# Altium PCB Senior-Analog-batteryrecharge.PcbDoc
Units mil, origin at the board's own origin, x right, y up, seen from the top; angles counter-clockwise.
Board outline 2500 x 2200 mil, 2 copper layers (Top Layer, Bottom Layer); 27 components, 21 nets, 80 pads, 7 vias.
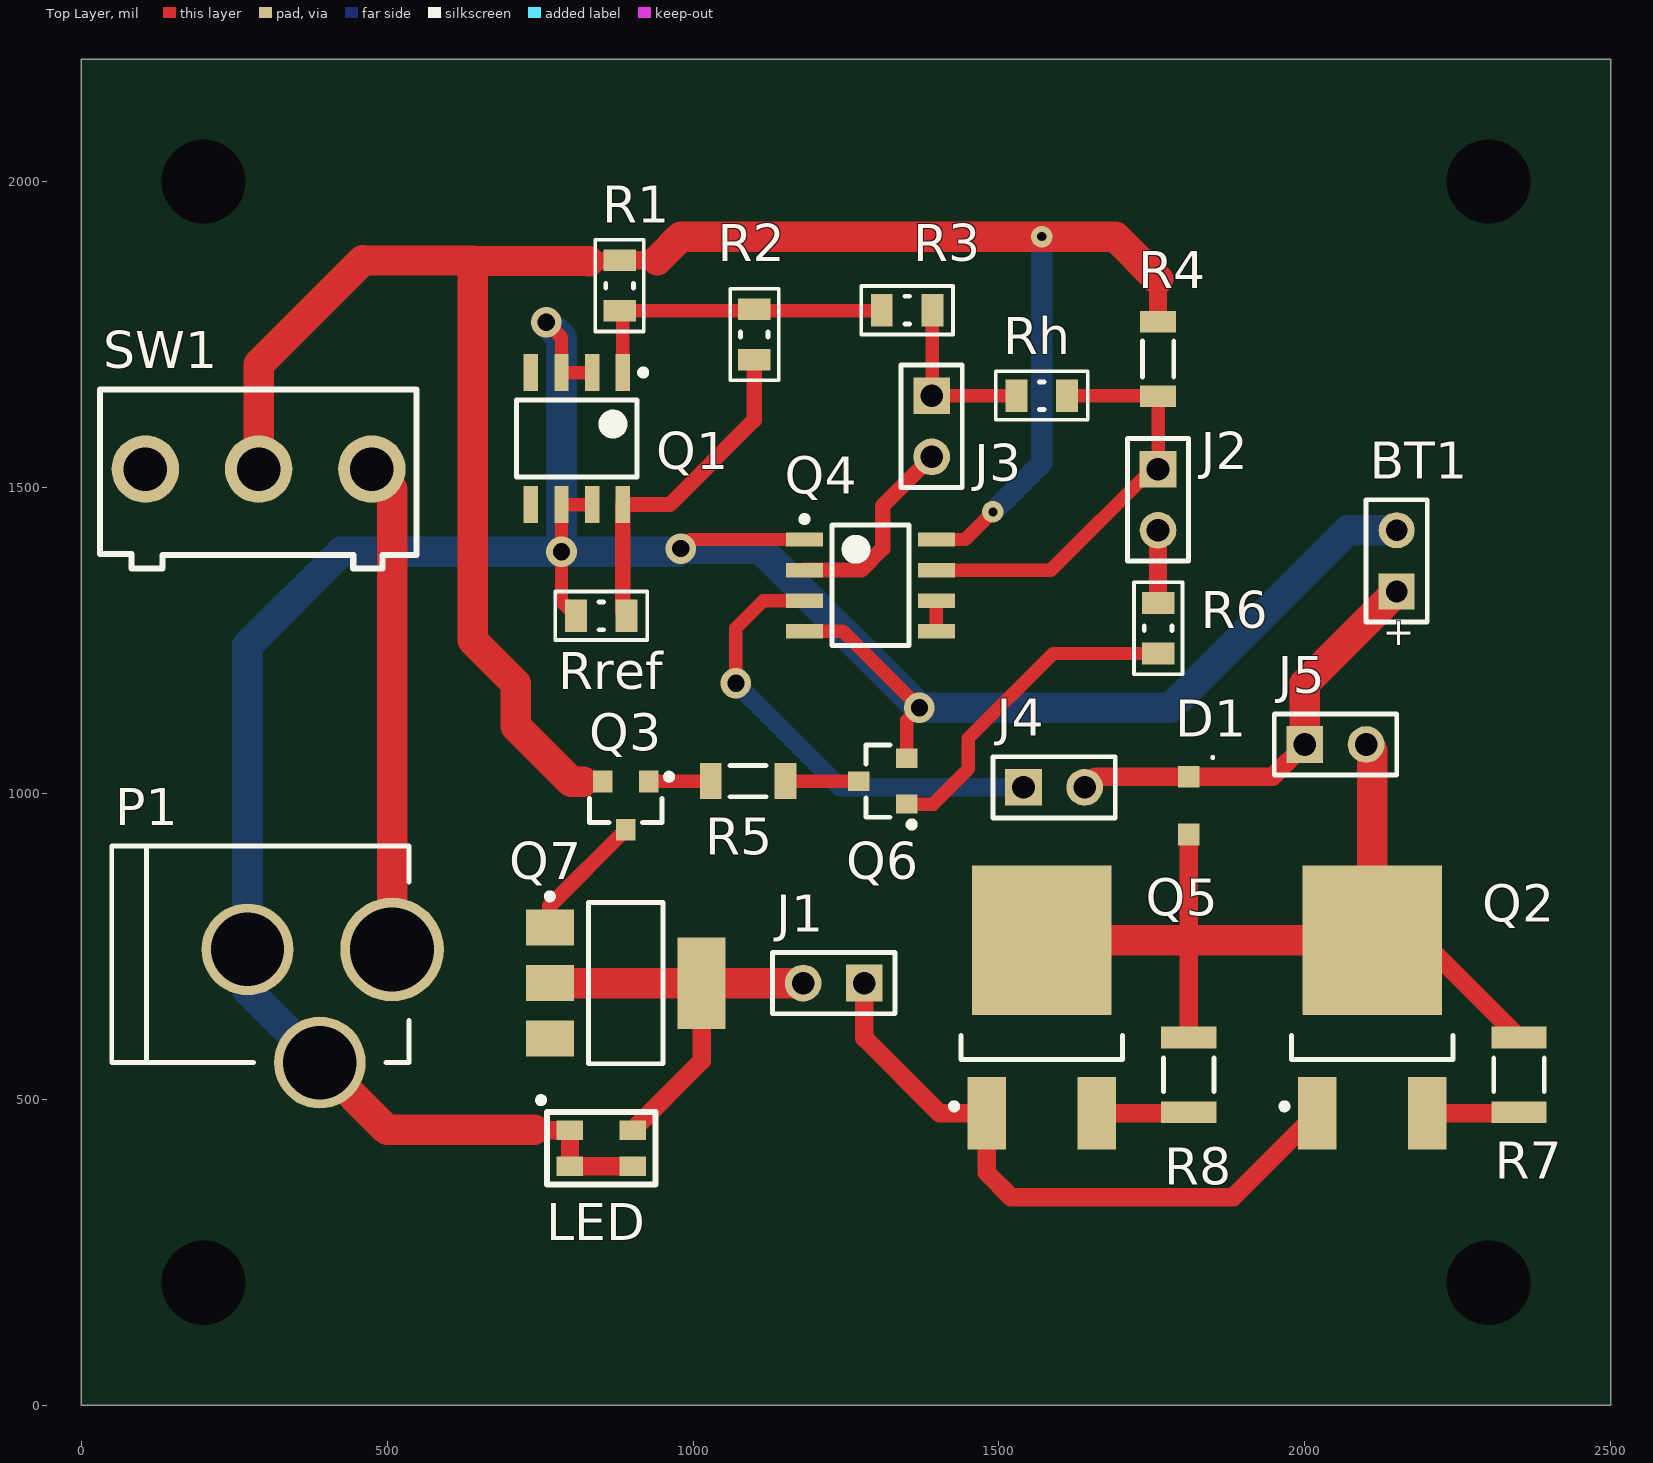
[diagram p0: Top Layer view]
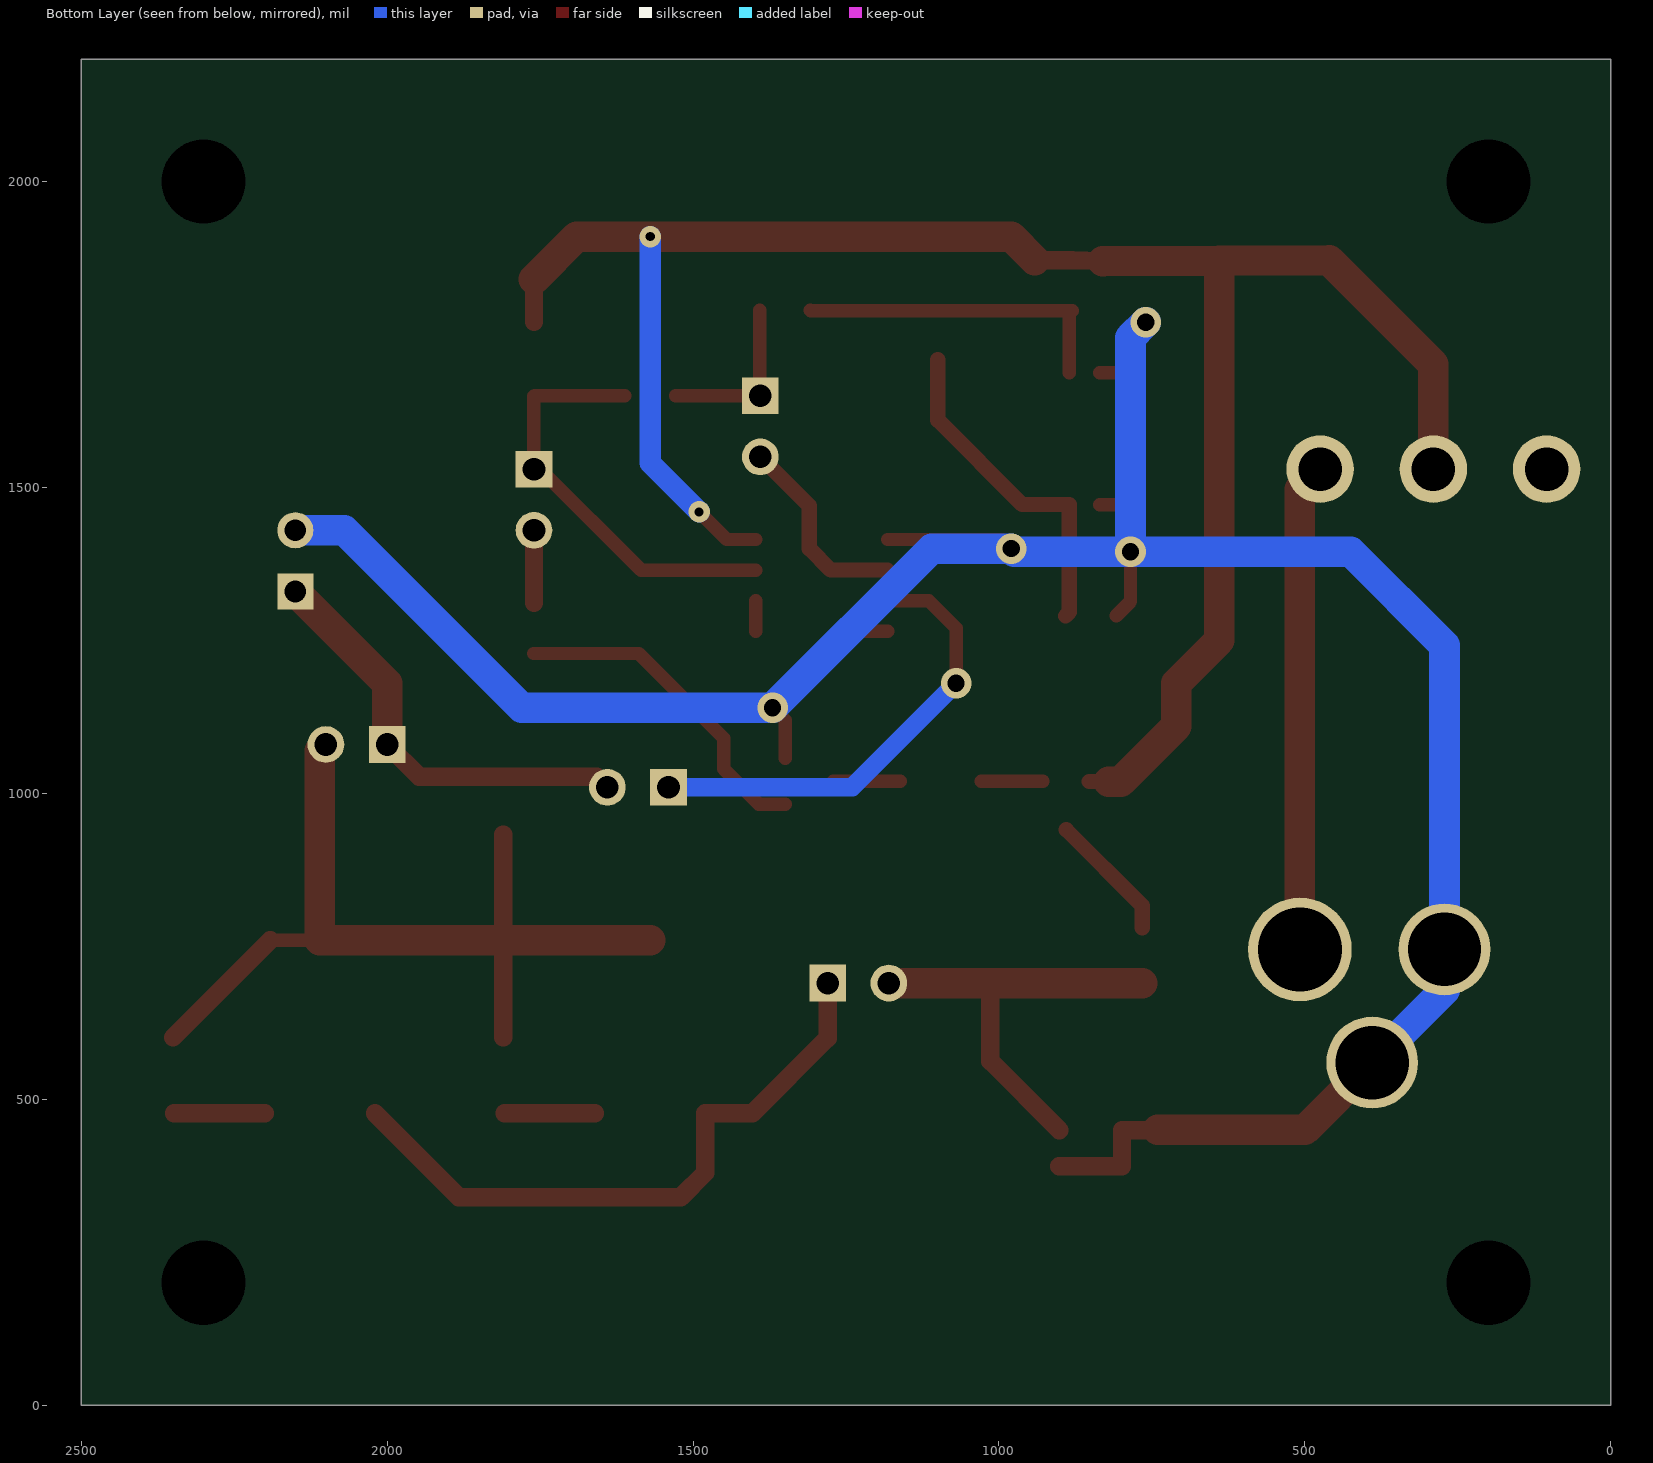
[diagram p1: Bottom Layer view, seen from below]

## Layer stack, top to bottom
Top Solder: solder mask 0.4, Solder Resist, Dk 3.5
Top Layer: signal copper 1.4
Dielectric 1: dielectric 12.6, FR-4, Dk 4.8
Bottom Layer: signal copper 1.4
Bottom Solder: solder mask 0.4, Solder Resist, Dk 3.5

## Board outline
0,0 0,2200 2500,2200 2500,0

## Design rules (kind name [scope] priority, off if disabled: settings)
Clearance [All] p1: gap=7
HoleSize [All] p1: absolutevalues=TRUE maxlimit=200 minlimit=1 maxpercent=80.000 minpercent=20.000
PolygonConnect [All] p1: connectstyle=Relief reliefconductorwidth=10 reliefentries=4 polygonreliefangle="90 Angle" airgapwidth=10
RoutingVias [All] p1: holewidth=28 width=50 viastyle="Through Hole" minholewidth=28 minwidth=50 maxholewidth=28 maxwidth=50
SilkToSilkClearance [All] p1: silktosilkclearance=7
SilkToSolderMaskClearance [IsPad] p1: minsilkscreentomaskgap=7 clearancetoexposedcopper=TRUE
SolderMaskExpansion [All] p1: expansion=4
Width [All] p1: maxlimit=100 minlimit=10 preferedwidth=10 minimp=50.000000 maximp=50.000000 favimp=50.000000
27 further rules are at their usual default settings.

## Components (designator, comment, footprint, x,y, rotation, side; value= is the part's Value field where it differs from the comment)
BT1 "Battery" BAT-2 2150,1380 r90 top
D1 "DB2J20600L" SODFL250X70-2N 1810,980 r270 top
J1 "2-pin Jumper" 2-pin-jumper 1280,690 r180 top
J2 "2-pin Jumper" 2-pin-jumper 1760,1530 r270 top
J3 "2-pin Jumper" 2-pin-jumper 1390,1650 r270 top
J4 "2-pin Jumper" 2-pin-jumper 1540,1010 r0 top
J5 "2-pin Jumper" 2-pin-jumper 2000,1080 r0 top
LED "LS E67B-S2V1-1-1-Z" OSRAM_LED 850,420 r270 top
P1 "PJ-002BH" PJ-002BH 390,560 r180 top
Q1 "TL431BCDG" SOIC127P600X175-8N 810,1580 r270 top
Q2 "NSI45090JDT4G" DPAK229P991X238-3N 2110,650 r90 top
Q3 "NSS40200LT1G" SOT95P245X110-3N 890,980 r0 top
Q4 "LM311DR2G" SOIC127P600X175-8N 1290,1340 r0 top
Q5 "NSI45090JDT4G" DPAK229P991X238-3N 1570,650 r90 top
Q6 "MMBT3904LT3G" SOT95P245X110-3N 1310,1020 r270 top
Q7 "NSI45025AZT1G" SOT230P700X180-4N 890,690 r0 top
R1 "RC0805FR-071KL" R0805 880,1830 r90 top
R2 "RC0805FR-071KL" R0805 1100,1750 r270 top
R3 "RC0805FR-071KL" R0805 1350,1790 r180 top
R4 "RC1206FR-071KL" R1206 1760,1710 r90 top
R5 "RC1206FR-071KL" R1206 1090,1020 r180 top
R6 "RC0805FR-075K6L" R0805 1760,1270 r270 top
R7 "R1210_generic" R1210 2350,540 r90 top
R8 "R1210_generic" R1210 1810,540 r90 top
Rh "RC0805FR-0718KL" R0805 1570,1650 r0 top
Rref "RC0805FR-075K1L" R0805 850,1290 r0 top
SW1 "MS12ANW03" "SPDT SWITCH" 290,1530 r270 top

## Footprints (in the part's own frame and the unit in brackets; to place one, negate y for a bottom-side part, rotate by r counter-clockwise, add the part's x,y. Pads: shape width x height; smd on the part's side, far side on the other; paste and mask are expansions set on the pad)
2-pin-jumper [mil]
  rect 60x60 hole 37: 1(0,0)
  round 60 hole 37: 2(100,0)
  silkscreen extent -50,-50 150,50
BAT-2 [mm] "Battery; 2 Leads"
  rect 1.5x1.5 hole 0.9: 1(-1.27,0)
  round 1.5 hole 0.9: 2(1.27,0)
  silkscreen extent -2.54,-1.27 2.54,1.27
DPAK229P991X238-3N [mm] "D-PAK, 3-Pads, Body 6.20x6.72mm (max), IPC Medium Density"
  rect 3x1.6 smd: 1(-4.39,2.29) 3(-4.39,-2.29)
  rect 6.2x5.8 smd: 4(2.79,0)
  silkscreen extent -4.22,-3.35 -1.15,3.76, body extent -0.51,-3.35 5.69,3.35, height 2.38
OSRAM_LED [mm]
  rect 0.8x1.1 smd: 1(-0.75,-1.3) 2(0.75,-1.3) 3(0.75,1.3) 4(-0.75,1.3)
  silkscreen extent -2.12,-2.62 1.5,2.25
PJ-002BH [mm] "2.5 mm Center Pin, 5.0 A, Right Angle, Through Hole, Dc Power Jack Connector"
  round 4.3 hole 3.5 paste+0: 1(-3,-4.7)
  round 3.81 hole 3.048 paste+0: 2(3,-4.7) 3(0,0)
  silkscreen extent -3.7,-9 8.64,0
R0805 [mm] "Chip Resistor, 2-Leads, Body 2.00x1.25mm, IPC Medium Density"
  rect 0.9x1.35 smd: 1(-1.05,0) 2(1.05,0)
  silkscreen extent -1.91,-1 1.91,1.02, body extent -1.05,-0.67 1.05,0.67, height 0.6
R1206 [mm] "Chip Resistor, 2-Leads, Body 3.05x1.55mm, IPC Medium Density"
  rect 0.9x1.5 smd: 1(-1.55,0) 2(1.55,0)
  silkscreen extent -0.75,-0.65 0.75,0.65, body extent -1.52,-0.77 1.53,0.78, height 0.55
R1210 [mm] "Chip Resistor, 2-Leads, Body 3.20x2.50mm, IPC Medium Density"
  rect 0.9x2.3 smd: 1(-1.55,0) 2(1.55,0)
  silkscreen extent -0.7,-1.05 0.7,1.05, body extent -1.6,-1.25 1.6,1.25, height 0.55
SODFL250X70-2N [mm] "SODFL, 2-Leads, Body 1.25x2.50mm, IPC Medium Density"
  rect 0.9x0.9 smd: 1(-1.2,0) 2(1.2,0)
  silkscreen extent -2.05,0.95 -1.95,1.05, body extent -0.85,-0.63 0.85,0.63, height 0.7
SOIC127P600X175-8N [mm] "SOIC, 8-Leads, Body 4.90x3.90mm, Pitch 1.27mm, IPC Medium Density"
  rect 1.52x0.6 smd: 1(-2.74,1.905) 2(-2.74,0.635) 3(-2.74,-0.635) 4(-2.74,-1.905) 5(2.74,-1.905) 6(2.74,-0.635) 7(2.74,0.635) 8(2.74,1.905)
  silkscreen extent -2.86,-2.5 1.6,2.88, body extent -2,-2.5 2,2.5, height 1.75
SOT95P245X110-3N [mm] "SOT23, 3-Leads, Body 2.90x2.45mm, Pitch 0.95mm, IPC Medium Density"
  rect 0.8x0.9 smd: 1(0.95,1) 2(-0.95,1) 3(0,-1)
  silkscreen extent -1.5,-0.7 1.93,1.32, body extent -1.5,-0.7 1.5,0.7, height 1.1
SOT230P700X180-4N [mm] "SOT223, 4-Leads, Body 6.50x7.00mm (avg), Pitch 2.30mm, IPC Medium Density"
  rect 2x1.5 smd: 1(-3.15,2.3) 2(-3.15,0) 3(-3.15,-2.3)
  rect 2x3.8 smd: 4(3.15,0)
  silkscreen extent -3.27,-3.35 1.55,3.72, body extent -1.85,-3.35 1.85,3.35, height 1.8
"SPDT SWITCH" [mm]
  round 2.8 hole 1.8: 1(0,4.7) 2(0,0) 3(0,-4.7)
  silkscreen extent -3.3,-6.58 4.13,6.55, body extent -3.11,-6.37 4,6.33, height 11.52

## Part data
BT1: "Multicell Battery"
D1: "DIODE SCHOTTKY 20V 1A SMINI2"
LED: "LED RED CLEAR 4PLCC SMD"
P1: "CONN PWR JACK 2.5X5.5MM HIGH CUR"
Q1: "IC VREF SHUNT ADJ 8SOIC"
Q2 Q5: "IC LED DRIVER/REG CCR DPAK"
Q3: "TRANS PNP 40V 2A SOT-23"
Q4: "IC COMPARATOR SGL HI VOLT 8SOIC"
Q6: "TRANS NPN 40V 0.2A SOT23"
Q7: "IC LED DRIVER LINEAR SOT-223"
R1 R2 R3: "RES SMD 1K OHM 1% 1/8W 0805"
R4 R5: "RES SMD 1K OHM 1% 1/4W 1206"
R6: "RES SMD 5.6K OHM 1% 1/8W 0805"
Rh: "RES SMD 18K OHM 1% 1/8W 0805"
Rref: "RES SMD 5.1K OHM 1% 1/8W 0805"
SW1: "SWITCH SLIDE SPDT 6A 125V"

## Free pads (board coordinates)
  round 60 hole 137.8: 0(200,200) 0(200,2000) 0(2300,200) 0(2300,2000)

## Via types
v1: diameter 50, hole 28, Top Layer to Bottom Layer, 5 vias
v2: diameter 35, hole 15, Top Layer to Bottom Layer, 2 vias

## Nets (pads, with @x,y where several pads share a name; then routed paths per layer and width w, separated by ;. In a path a pad name is that pad's centre, name@x,y a point inside that pad or via, vN(x,y) a via of type N, cw(c..) or ccw(c..) an arc to the next point about the centre after c; other vN are vias at no path point)
BAT+: J4.1 Q4.3 | length 761.2
  Top Layer w22: v1(1070,1180) 1070,1270 1115,1315 Q4.3
  Bottom Layer w30: v1(1070,1180) 1240,1010 J4.1
GND: BT1.2 LED.1 LED.2 LED.3 P1.2 P1.3 Q1.2 Q1.3 Q1.6 Q1.7 Q4.1 Q4.4 Q6.2 Rref.1 | length 4827.1
  Top Layer w22: v1(760,1770) 785,1745 Q1.3 Q1.2 ; Rref.1 785,1313.66 v1(785,1395) Q1.6 Q1.7 ; v1(980,1400) 995,1415 Q4.1 ; Q4.4 1245,1265 v1(1370,1140) 1349.37,1119.37 Q6.2
  Top Layer w30: 740,450 740.47,449.53 LED.1 LED.2 LED.3
  Top Layer w50: P1.3 500,450 740,450
  Bottom Layer w50: P1.3 271.89,678.11 P1.2 271.89,1241.89 425,1395 v1(785,1395) ; v1(760,1770) 785,1745 v1(785,1395) ; BT1.2 2070,1430 1780,1140 v1(1370,1140) 1110,1400 v1(980,1400) 975,1395 v1(785,1395)
NetBT1_1: BT1.1 D1.1 J4.2 J5.1 | length 701.1
  Top Layer w30: J4.2 1657.24,1027.24 D1.1 1947.24,1027.24 J5.1
  Top Layer w50: J5.1 2000,1180 BT1.1
NetD1_2: D1.2 J5.2 Q2.4 Q5.4 R7.2 R8.2 | length 1501.8
  Top Layer w22: Q2.4 Q2.4@2191.18,759.84
  Top Layer w30: R8.2 1810,759.84 D1.2 ; Q2.4@2191.18,759.84 R7.2
  Top Layer w50: Q5.4 1810,759.84 Q2.4 2110,1070 J5.2
NetJ1_1: J1.1 Q2.1 Q5.1 | length 1051.2
  Top Layer w30: J1.1 1280,600 1402.83,477.17 Q5.1 1479.84,380.16 1520,340 1882.68,340 Q2.1
NetJ1_2: J1.2 LED.4 Q7.2 Q7.4 | length 701.2
  Top Layer w30: LED.4 1014.02,562.36 Q7.4
  Top Layer w50: Q7.2 Q7.4 J1.2
NetJ2_1: J2.1 Q4.7 R4.1 Rh.2 | length 697.1
  Top Layer w22: Q4.7 1585,1365 1750,1530 J2.1 R4.1 ; Rh.2 R4.1@1758.98,1650
NetJ2_2: J2.2 R6.1 | length 118.7
  Top Layer w30: R6.1 J2.2
NetJ3_1: J3.1 R3.1 Rh.1 | length 279.2
  Top Layer w22: R3.1 1391.34,1651.34 J3.1 Rh.1
NetJ3_2: J3.2 Q4.2 | length 325.5
  Top Layer w25: Q4.2 1275,1365 1310,1400 1310,1470 J3.2
NetQ1_1: Q1.1 R1.1 R2.1 R3.2 | length 532.1
  Top Layer w22: Q1.1 885,1783.66 R1.1 1307.32,1788.66 R3.2
NetQ1_8: Q1.8 R2.2 Rref.2 | length 555.5
  Top Layer w25: Rref.2 885,1296.34 Q1.8 962.13,1472.13 1100,1610 R2.2
NetQ2_3: Q2.3 R7.1 | length 148
  Top Layer w30: Q2.3 R7.1@2348.19,477.17
NetQ3_1: Q3.1 R5.2 | length 100.9
  Top Layer w22: Q3.1@928.03,1020 R5.2
NetQ3_3: Q3.3 Q7.1 | length 211.4
  Top Layer w25: Q7.1 765.98,816.61 Q3.3
NetQ5_3: Q5.3 R8.1 | length 150.6
  Top Layer w22: R8.1@1808.19,477.17 R8.1
  Top Layer w30: Q5.3 R8.1@1808.19,477.17
NetQ6_1: Q6.1 R6.2 | length 541.8
  Top Layer w22: Q6.1 1392.6,982.6 1450,1040 1450,1090 1588.66,1228.66 R6.2
NetQ6_3: Q6.3 R5.1 | length 109.6
  Top Layer w22: R5.1@1161.02,1020 Q6.3
TIE: Q4.5 Q4.6 | length 50
  Top Layer w22: Q4.5 Q4.6
VCC: Q3.2 Q4.8 R1.2 R4.2 SW1.2 | length 3389.2
  Top Layer w22: Q4.8 1445,1415 v2(1490,1460)
  Top Layer w25: 820.63,1019.37 Q3.2
  Top Layer w30: 830,1870.03 R1.2 941.34,1871.34 ; R4.2 1760,1840
  Top Layer w50: SW1.2 290,1701.16 460,1871.16 640,1870.61 ; 820.63,1019.37 800.63,1019.37 710,1110 710,1180 640,1250 640,1870.61 ; 830,1870.03 640,1870.61 ; 941.34,1871.34 980,1910 1690,1910 1760,1840
  Bottom Layer w35: v2(1490,1460) 1570,1540 v2(1570,1910)
VDC: P1.1 SW1.1 | length 798.7
  Top Layer w50: SW1.1 508.11,1496.93 P1.1
pads on no net: Q1.4 Q1.5 Q7.3 SW1.3

## Silkscreen, mask and mechanical layers (free items; w line width, h text height)
Mechanical 5:
  the board outline again, w10

## Text inside footprints (layer, text, board x,y; h text height)
BT1: Top Overlay "+" at 2172.72,1235.51 h45.28 r90